# Altium PCB MP3_GIT.PcbDoc (part 1 of 2)
Units mm, origin at the board's own origin, x right, y up, seen from the top; angles counter-clockwise.
Board outline 55.37 x 101.47 mm, 4 copper layers (Top Layer, Int1 (GND), Int2 (PWR), Bottom Layer), stack 1.571 mm thick; 90 components, 60 nets, 372 pads, 171 vias.
Unrouted connection lines stored in the file: 1.
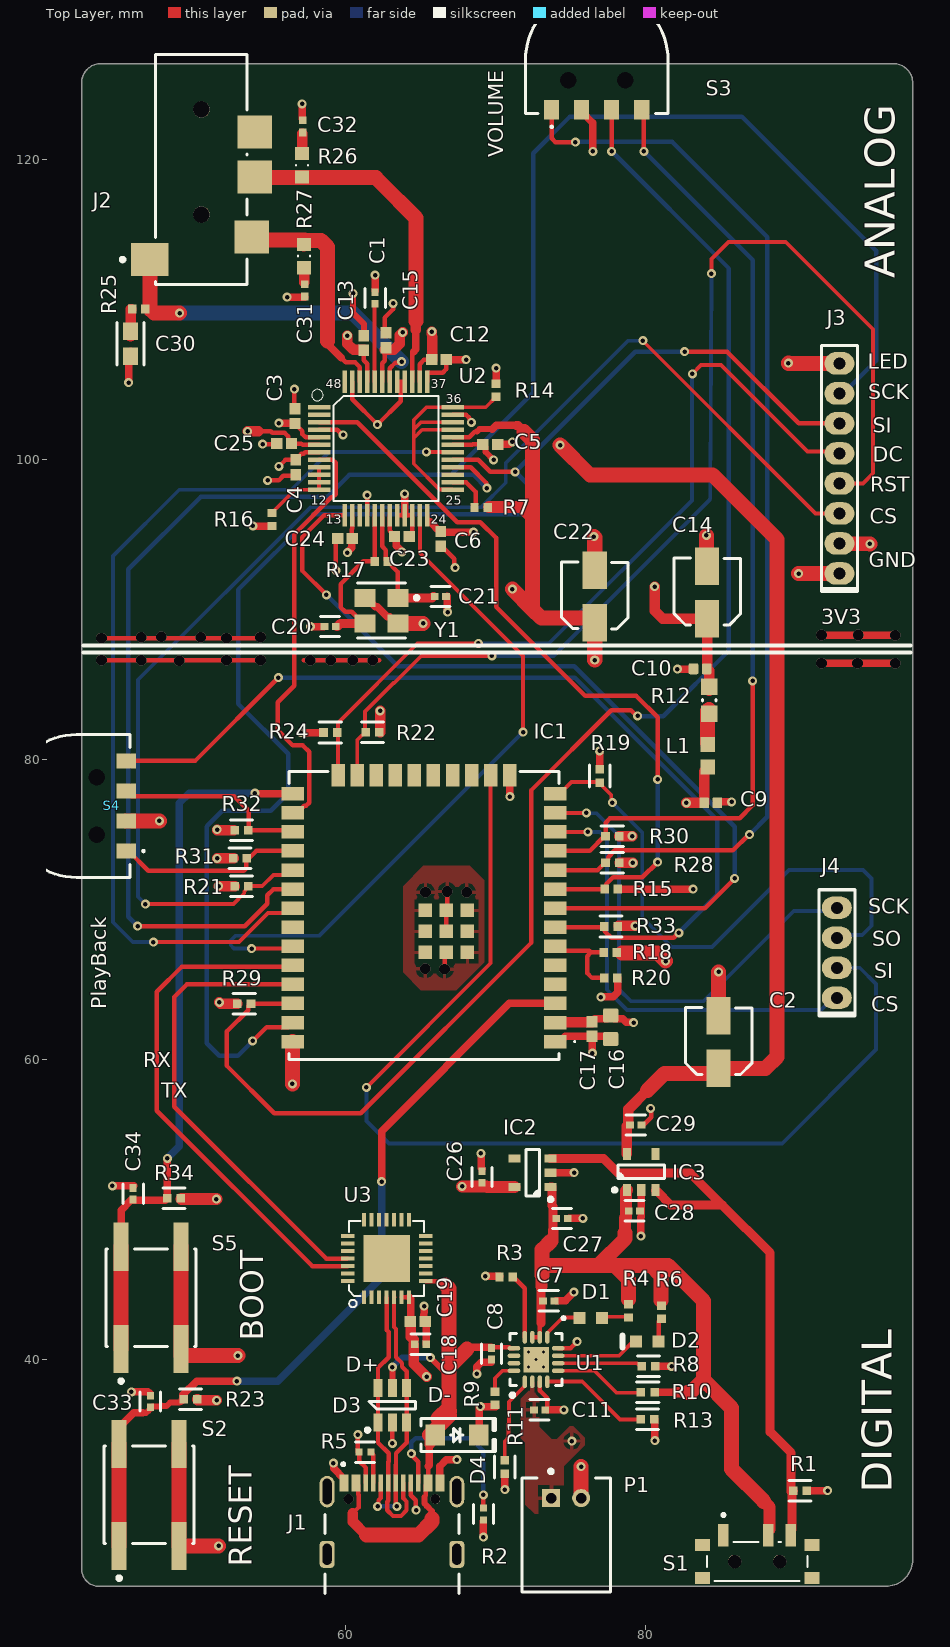
[diagram p0: Top Layer view]
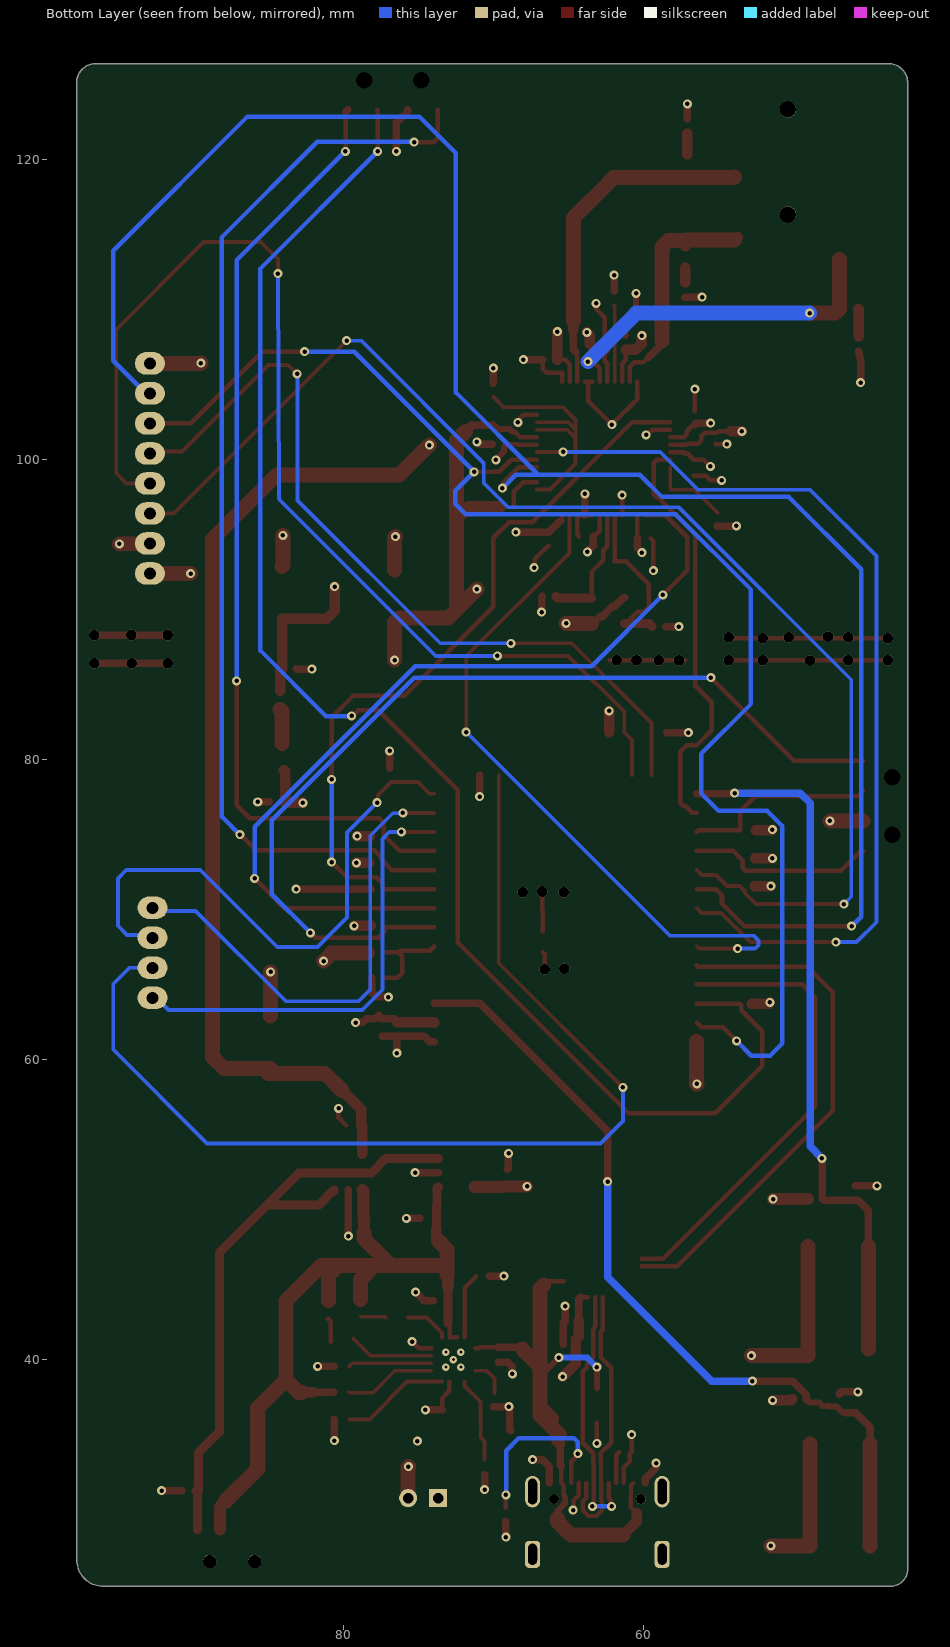
[diagram p1: Bottom Layer view, seen from below]
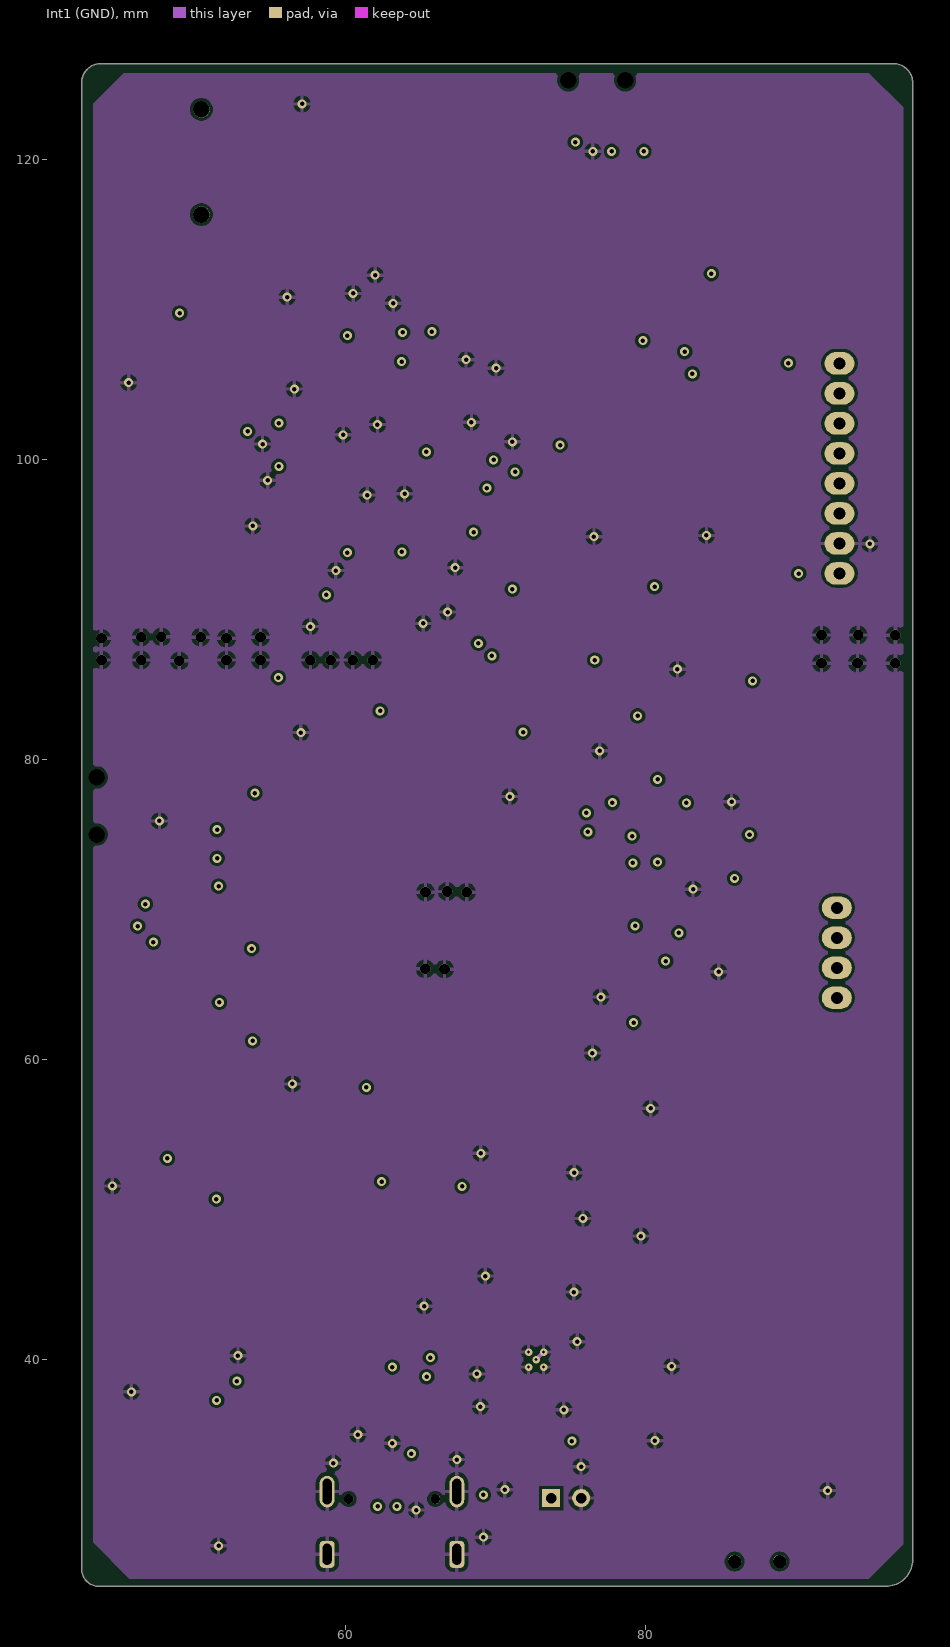
[diagram p2: Int1 (GND)]
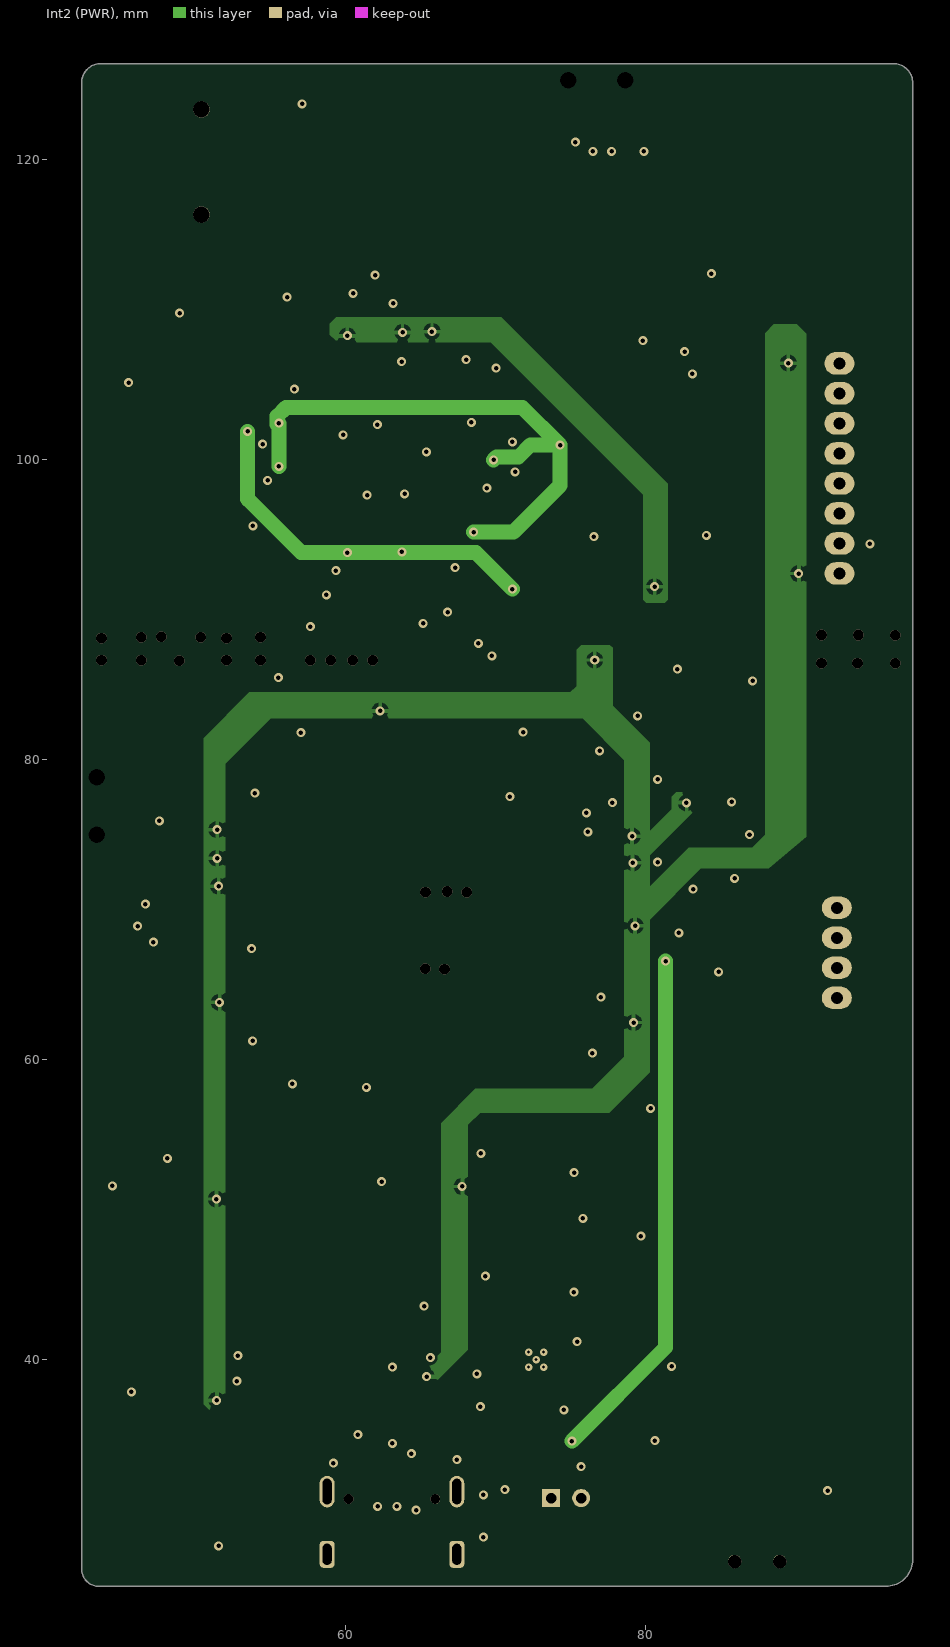
[diagram p3: Int2 (PWR)]
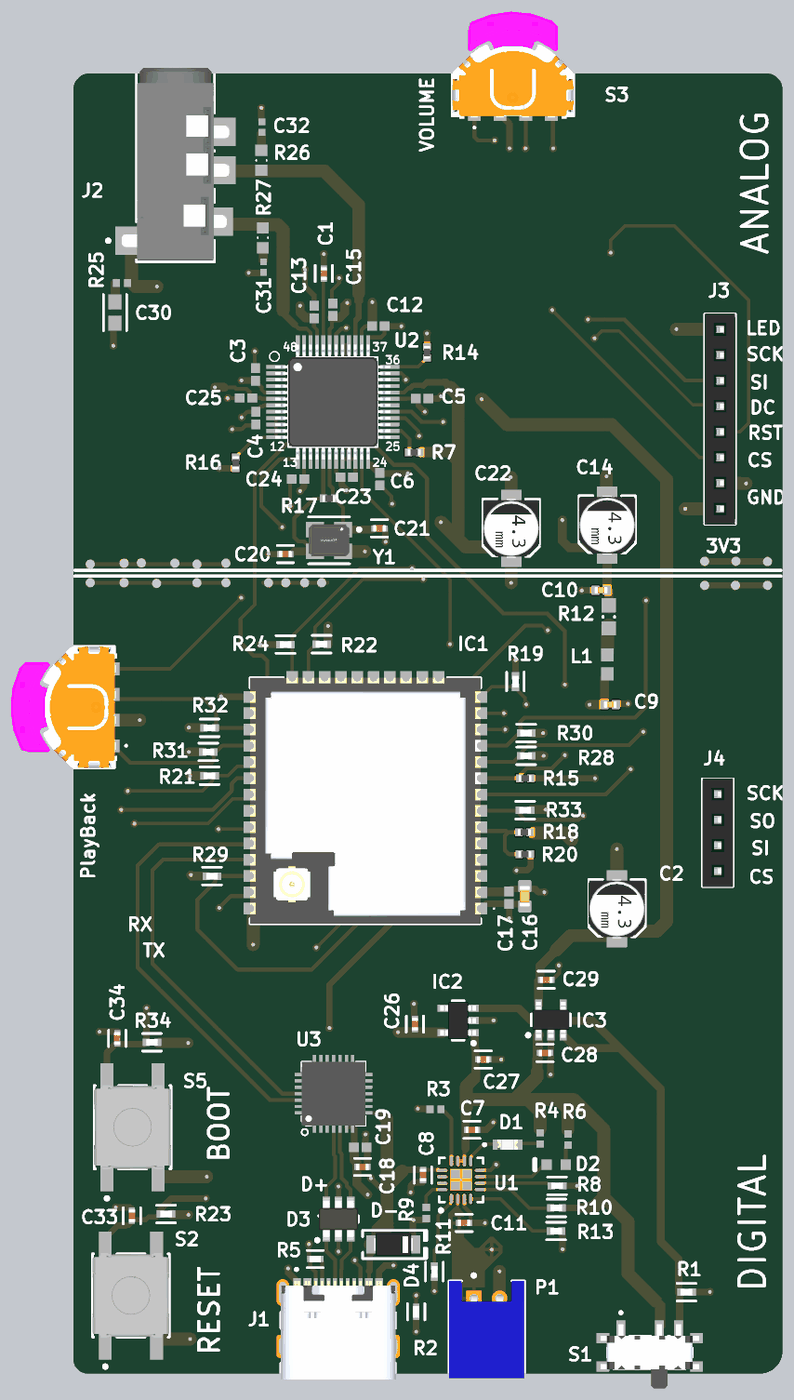
[diagram p5: 3D render of the assembled board from above, using the file's embedded part models]

## Layer stack, top to bottom
Top Solder: solder mask 0.0254, SM-001, Dk 4
Top Layer: signal copper 0.035
Dielectric 1: prepreg 0.2027, 7628, RC 49%, 8.6 mil, Dk 4.1
Int1 (GND): signal copper 0.0152
Dielectric 3: core 1.065, 1.1mm H/HOZ with copper, Dk 4.4
Int2 (PWR): signal copper 0.0152
Dielectric 5: prepreg 0.2027, 7628, RC 49%, 8.6 mil, Dk 4.1
Bottom Layer: signal copper 0.035
Bottom Solder: solder mask 0.0254, SM-001, Dk 4

## Board outline
42.418,26.035 ccw(c43.561,26.035) 43.561,24.892 96.012,24.892 ccw(c96.012,26.67) 97.79,26.67 97.79,125.095 ccw(c96.52,125.095) 96.52,126.365 43.688,126.365 ccw(c43.688,125.095) 42.418,125.095

## Design rules (kind name [scope] priority, off if disabled: settings)
Clearance [All] p1: gap=0.2 ignorepadtopadclearanceinfootprint=TRUE
DiffPairsRouting [All] p1: maxlimit=0.254 minlimit=0.203 mostfreqgap=0.254 toplayer_maxgap=0.203 toplayer_prefgap=0.203 toplayer_minwidth=0.286 toplayer_maxwidth=0.286 toplayer_prefwidth=0.286 bottomlayer_maxgap=0.203 bottomlayer_prefgap=0.203 bottomlayer_minwidth=0.286 bottomlayer_maxwidth=0.286 bottomlayer_prefwidth=0.286 impedanceprofiledriven=TRUE impedanceprofileid={A6390A73-D8A5-4BA7-A250-E89249BDB197} impedanceprofilevalue=90.000000 maxuncoupledlength=12.7
PolygonConnect [All] p1: connectstyle=Relief reliefconductorwidth=0.254 reliefentries=4 polygonreliefangle="90 Angle" airgapwidth=0.254
RoutingVias [All] p1: holewidth=0.3 width=0.6 viastyle="Through Hole" minholewidth=0.3 minwidth=0.5 maxholewidth=0.45 maxwidth=0.9
SolderMaskExpansion [All] p1: expansion=0 istentingtop=FALSE
SupplyNets "Schematic Supply Nets_6" [InNet('+VOUT')] p1: voltage=0.000
SupplyNets "Schematic Supply Nets_5" [InNet('+3V3')] p2: voltage=0.000
SupplyNets "Schematic Supply Nets_4" [InNet('+5V')] p3: voltage=0.000
SupplyNets "Schematic Supply Nets_3" [InNet('GND')] p4: voltage=0.000
SupplyNets "Schematic Supply Nets_2" [InNet('+1V8')] p5: voltage=0.000
SupplyNets "Schematic Supply Nets_1" [InNet('+AVDD')] p6: voltage=0.000
SupplyNets "Schematic Supply Nets" [InNet('+VBAT')] p7: voltage=0.000
UnRoutedNet [All] p1: checkbadconnections=TRUE
Width [All] p1: maxlimit=1 minlimit=0.2 preferedwidth=0.254 minimp=50.000000 maximp=50.000000 favimp=50.000000
28 further rules are at their usual default settings.

## Classes and differential pairs
differential pair class USB_D_P: USB_D
differential pair class USB_D_N: USB_D
differential pair USB_D: +USB_D_P -USB_D_N

## Components (designator, comment, footprint, x,y, rotation, side; value= is the part's Value field where it differs from the comment)
C1 "1uF" FP-CL511-IPC_C 61.976,110.744 r270 top
C2 "10 µF" "CAP ALSMD 4.3MM H5.4MM" 84.861,61.163 r90 top
C3 "100nF" CAPC1005X55X25ML05T10 56.635,102.868 r270 top
C4 "100nF" CAPC1005X55X25ML05T10 56.675,99.461 r90 top
C5 "100nF" CAPC1005X55X25ML05T10 69.639,100.99 r180 top
C6 "100nF" CAPC1005X55X25ML05T10 66.345,94.691 r90 top
C7 "4u7" FP-CL282-IPC_C 73.541,43.917 r0 top
C8 "1uF" FP-CL511-IPC_C 69.723,40.386 r270 top
C9 "CL05A106MQ5NUNC" CAPC1005X70N 84.341,77.101 r180 top value=10µF
C10 "CL05A106MQ5NUNC" CAPC1005X70N 83.624,86.03 r0 top value=10µF
C11 "4u7" FP-CL282-IPC_C 72.931,36.652 r0 top
C12 "100nF" CAPC1005X55X25ML05T10 66.23,106.647 r180 top
C13 "100nF" CAPC1005X55X25ML05T10 61.214,107.747 r270 top
C14 "10 µF" "CAP ALSMD 4.3MM H5.4MM" 84.099,91.11 r90 top
C15 "100nF" CAPC1005X55X25ML05T10 62.687,107.927 r270 top
C16 "CL10A226MQ8NRNC" CAPC1608X100N 77.671,62.145 r90 top value=22µF
C17 "100nF" CAPC1005X55X25ML05T10 76.429,62.027 r90 top
C18 "4u7" FP-CL282-IPC_C 64.999,41.022 r0 top
C19 "100nF" CAPC1005X55X25ML05T10 64.808,42.545 r180 top
C20 "33pF" FP-CL790-IPC_C 58.976,88.849 r180 top
C21 "33pF" FP-CL790-IPC_C 66.319,90.856 r0 top
C22 "10 µF" "CAP ALSMD 4.3MM H5.4MM" 76.606,90.853 r90 top
C23 "100nF" CAPC1005X55X25ML05T10 63.754,94.844 r180 top
C24 "100nF" CAPC1005X55X25ML05T10 59.969,94.717 r0 top
C25 "100nF" CAPC1005X55X25ML05T10 55.91,101.041 r0 top
C26 "1uF" FP-CL511-IPC_C 69.088,52.168 r90 top
C27 "1uF" FP-CL511-IPC_C 74.422,49.403 r0 top
C28 "1uF" FP-CL511-IPC_C 79.248,49.911 r0 top
C29 "1uF" FP-CL511-IPC_C 79.342,55.626 r0 top
C30 "47nF" FP-CL10-IPC_A 45.669,107.696 r270 top
C31 "10nF" CAPC1005X55X25LL05T05 57.277,111.244 r90 top
C32 "10nF" CAPC1005X55X25LL05T05 57.15,122.174 r270 top
C33 "1uF" FP-CL511-IPC_C 46.99,37.211 r90 top
C34 "1uF" FP-CL511-IPC_C 45.847,51.054 r90 top
D1 "RED" LED_KT-0603R 76.327,42.756 r0 top
D2 "Blue" LTST-C190TBKT-2_V 80.112,41.199 r180 top
D3 "USBLC6-4SC6" "ST SOT23-6L" 63.119,36.957 r90 top
D4 "" "SMF DO-219AB" 67.412,34.966 r0 top
IC1 "ESP32-WROOM-32UE-N4" ESP32WROOM32UEN4 65.223,69.602 r180 top
IC2 "AP2112K-3.3TRG1" "DIODES SOT-23-5 W5" 72.466,52.451 r180 top
IC3 "AP2112K-1.8TRG1" "DIODES SOT-23-5 W5" 79.705,52.502 r90 top
J1 "USB4105-GF-A-120" GCT_USB4105-GF-A-120 63.094,27.026 r0 top
J2 "SJ2-3574A-SMT-TR" FP-SJ2-3574A-SMT-TR-MFG 50.394,119.307 r270 top
J3 "NPPN081BFCN-RC" "SULLINS NPPN081BFCN" 92.913,99.386 r90 top
J4 "NPPN041BFCN-RC" "SULLINS NPPN041BFCN" 92.735,67.11 r90 top
L1 "LQM18PN3R3MFRL" INDC1608X95N 84.125,80.239 r90 top value=3.3µH
P1 "S2B-PH-K-S(LF)(SN)" JST-S2B-PH-K-S_V 74.701,28.321 r0 top
R1 "10K" FP-CRCW0402-e3-IPC_B 90.297,31.246 r0 top
R2 "5K1" FP-CRCW0402-e3-IPC_C 69.19,29.718 r90 top
R3 "0402WGF1101TCE" RESC1005X40N#1 70.695,45.518 r0 top value=1K1
R4 "0402WGF1101TCE" RESC1005X40N#1 78.867,43.242 r90 top value=1K1
R5 "5K1" FP-CRCW0402-e3-IPC_C 61.303,33.833 r0 top
R6 "0402WGF1101TCE" RESC1005X40N#1 81.044,43.156 r90 top value=1K1
R7 "0402WGF1003TCE" RESC1005X40N#2 69.029,96.794 r0 top value=100k
R8 "10K" FP-CRCW0402-e3-IPC_B 80.188,39.548 r180 top
R9 "0402WGF1101TCE" RESC1005X40N#1 69.973,37.428 r90 top value=1K1
R10 "10K" FP-CRCW0402-e3-IPC_B 80.137,37.821 r180 top
R11 "10K" FP-CRCW0402-e3-IPC_B 70.612,32.842 r270 top
R12 "1R" RESC0603(1608)_M 84.226,83.947 r90 top value="1.00 Ohm"
R13 "10K" FP-CRCW0402-e3-IPC_B 80.112,36.017 r0 top
R14 "0402WGF1003TCE" RESC1005X40N#2 70.028,104.597 r270 top value=100k
R15 "0402WGF1003TCE" RESC1005X40N#2 77.699,71.349 r180 top value=100k
R16 "0402WGF1003TCE" RESC1005X40N#2 55.093,95.982 r90 top value=100k
R17 "CRCW04021M00FKEDHP" RESC1005X40N#3 62.38,93.193 r0 top value=1M
R18 "0402WGF1003TCE" RESC1005X40N#2 77.643,67.132 r0 top value=100k
R19 "10K" FP-CRCW0402-e3-IPC_B 76.937,78.897 r270 top
R20 "0402WGF1003TCE" RESC1005X40N#2 77.673,65.43 r180 top value=100k
R21 "10K" FP-CRCW0402-e3-IPC_B 53.056,71.548 r0 top
R22 "10K" FP-CRCW0402-e3-IPC_B 61.803,81.813 r180 top
R23 "10K" FP-CRCW0402-e3-IPC_B 49.657,37.344 r0 top
R24 "10K" FP-CRCW0402-e3-IPC_B 58.983,81.788 r180 top
R25 "0402WGF100JTCE" RESC1005X40N#1 46.219,110.007 r0 top value=10R
R26 "0603WAF200JT5E" RESC1608X55N 57.099,119.579 r90 top value=20R
R27 "0603WAF200JT5E" RESC1608X55N 57.221,113.538 r270 top value=20R
R28 "10K" FP-CRCW0402-e3-IPC_B 77.775,73.105 r0 top
R29 "10K" FP-CRCW0402-e3-IPC_B 53.246,63.718 r180 top
R30 "10K" FP-CRCW0402-e3-IPC_B 77.775,74.876 r0 top
R31 "10K" FP-CRCW0402-e3-IPC_B 52.959,73.406 r180 top
R32 "10K" FP-CRCW0402-e3-IPC_B 53.056,75.286 r180 top
R33 "10K" FP-CRCW0402-e3-IPC_B 77.697,68.859 r0 top
R34 "10K" FP-CRCW0402-e3-IPC_B 48.557,50.747 r0 top
S1 "SSSS811101" SW_SSSS811101 87.429,26.543 r0 top value=N/A
S2 "EVQ-Q2Y03W" PNSC-EVQQ2_V 46.914,30.988 r90 top
S3 "SLLB520100" SLLB520100 76.738,127.197 r0 top
S4 "SLLB520100" SLLB520100 41.484,76.891 r90 top
S5 "EVQ-Q2Y03W" PNSC-EVQQ2_V 47.041,44.12 r90 top
U1 "BQ24074RGTRG4" RGT16-1700X1700TP 72.695,40.005 r90 top
U2 "" LQFP48-0.5-7X7MM 62.687,100.711 r0 top
U3 "" QFN28G_0.5-5X5MM 62.738,46.736 r90 top
Y1 "12.288 MHz" FP-ABM8G-MFG 62.382,89.916 r180 top

## Footprints (in the part's own frame and the unit in brackets; to place one, negate y for a bottom-side part, rotate by r counter-clockwise, add the part's x,y. Pads: shape width x height; smd on the part's side, far side on the other; paste and mask are expansions set on the pad)
"CAP ALSMD 4.3MM H5.4MM" [mm] "Aluminum Electrolytic Capacitor, Body 4.30x4.30x5.40mm, IPC Low Density"
  rect 2.5x1.6 smd: 1(-1.75,0) 2(1.75,0)
  silkscreen extent -2.17,-2.21 2.3,2.2, body extent -2.3,-2.2 2.3,2.2, height 5.4
CAPC1005X55X25LL05T05 [mm] "Chip Capacitor, 2-Leads, Body 1.00x0.50mm, IPC High Density"
  rect 0.52x0.52 smd: 1(-0.41,0) 2(0.41,0)
  body extent -0.53,-0.28 0.53,0.28, height 0.55
CAPC1005X55X25ML05T10 [mm] "Chip Capacitor, 2-Leads, Body 1.00x0.50mm, IPC Low Density"
  rect 0.76x0.72 smd: 1(-0.49,0) 2(0.49,0)
  body extent -0.53,-0.28 0.53,0.27, height 0.55
CAPC1005X70N [mm]
  rrect25% 0.64x0.72 smd paste+0 mask+0.102: 1(-0.439,0) 2(0.439,0)
  body extent -0.5,-0.25 0.5,0.25, height 0.7
CAPC1608X100N [mm]
  rrect25% 0.94x1.02 smd: 1(-0.79,0) 2(0.79,0)
  body extent -0.8,-0.4 0.8,0.4, height 1
"DIODES SOT-23-5 W5" [mm] "SOT23, 5-Leads, Body 3.00x2.85mm, Pitch 0.95mm, IPC Medium Density"
  rect 0.8x0.55 smd: 1(-1.2,0.95) 2(-1.2,0) 3(-1.2,-0.95) 4(1.2,-0.95) 5(1.2,0.95)
  silkscreen extent -1.33,-1.55 0.45,1.9, body extent -1.41,-1.45 1.41,1.45, height 1.5
ESP32WROOM32UEN4 [mm]
  rect 1.5x0.9 smd: 1(-8.75,8.41) 2(-8.75,7.14) 3(-8.75,5.87) 4(-8.75,4.6) 5(-8.75,3.33) 6(-8.75,2.06) 7(-8.75,0.79) 8(-8.75,-0.48) 9(-8.75,-1.75) 10(-8.75,-3.02) 11(-8.75,-4.29) 12(-8.75,-5.56) 13(-8.75,-6.83) 14(-8.75,-8.1) 25(8.75,-8.1) 26(8.75,-6.83) 27(8.75,-5.56) 28(8.75,-4.29) 29(8.75,-3.02) 30(8.75,-1.75) 31(8.75,-0.48) 32(8.75,0.79) 33(8.75,2.06) 34(8.75,3.33) 35(8.75,4.6) 36(8.75,5.87) 37(8.75,7.14) 38(8.75,8.41)
  rect 0.9x1.5 smd: 15(-5.715,-9.35) 16(-4.445,-9.35) 17(-3.175,-9.35) 18(-1.905,-9.35) 19(-0.635,-9.35) 20(0.635,-9.35) 21(1.905,-9.35) 22(3.175,-9.35) 23(4.445,-9.35) 24(5.715,-9.35)
  rect 0.9x0.9 smd: 39(-1.5,1.07) 40(-2.9,1.07) 41(-0.1,1.07) 42(-2.9,-0.33) 43(-1.5,-0.33) 44(-0.1,-0.33) 45(-0.1,2.47) 46(-1.5,2.47) 47(-2.9,2.47)
  silkscreen extent -10.1,-9.6 9,9.6, body extent -9,-9.6 9,9.6, height 3.35
FP-ABM8G-MFG [mm]
  rect 1.4x1.2 smd paste+0 mask+0: 1(-1.1,-0.85) 2(1.1,-0.85) 3(1.1,0.85) 4(-1.1,0.85)
  silkscreen extent -2.48,-1.83 1.6,1.83, body extent -1.9,-1.55 1.9,1.55, height 0.25
FP-CL10-IPC_A [mm]
  rect 1.158x1.012 smd paste+0 mask+0: 1(-0.827,0) 2(0.827,0)
  silkscreen extent -1.41,-0.91 1.41,0.91, body extent -1.91,-1.01 1.91,1.01, height 0.25
FP-CL282-IPC_C [mm]
  rect 0.515x0.472 smd paste+0 mask+0: 1(-0.379,0) 2(0.379,0)
  silkscreen extent -0.64,-0.67 0.64,0.67, body extent -0.74,-0.38 0.74,0.38, height 0.25
FP-CL511-IPC_C [mm]
  rect 0.515x0.472 smd paste+0 mask+0: 1(-0.379,0) 2(0.379,0)
  silkscreen extent -0.64,-0.67 0.64,0.67, body extent -0.74,-0.38 0.74,0.38, height 0.25
FP-CL790-IPC_C [mm]
  rect 0.515x0.472 smd paste+0 mask+0: 1(-0.379,0) 2(0.379,0)
  silkscreen extent -0.64,-0.67 0.64,0.67, body extent -0.74,-0.38 0.74,0.38, height 0.25
FP-CRCW0402-e3-IPC_B [mm]
  rect 0.568x0.572 smd paste+0 mask+0: 1(-0.452,0) 2(0.452,0)
  silkscreen extent -0.74,-0.69 0.74,0.69, body extent -0.89,-0.44 0.89,0.44, height 0.25
FP-CRCW0402-e3-IPC_C [mm]
  rect 0.468x0.472 smd paste+0 mask+0: 1(-0.402,0) 2(0.402,0)
  silkscreen extent -0.64,-0.67 0.64,0.67, body extent -0.74,-0.38 0.74,0.38, height 0.25
FP-SJ2-3574A-SMT-TR-MFG [mm]
  rect 2.2x2.5 smd paste+0 mask+0: 1(6,-3.45)
  rect 2.2x2.3 smd paste+0 mask+0: 2(4.5,3.35) 3(0.5,3.55) 4(-2.5,3.55)
  round 1.1 hole 1.1 unplated paste-2539.97 mask+0: ""(-4,0) ""(3,0)
  silkscreen extent -7.65,-5.37 7.65,3.05, body extent -7.75,-4.8 7.75,4.8, height 0.25
GCT_USB4105-GF-A-120 [mm]
  rect 0.6x1.15 smd: A1_B12(-3.2,4.755) A4_B9(-2.4,4.755) B1_A12(3.2,4.755) B4_A9(2.4,4.755)
  rect 0.3x1.15 smd: A5(-1.25,4.755) A6(-0.25,4.755) A7(0.25,4.755) A8(1.25,4.755) B5(1.75,4.755) B6(0.75,4.755) B7(-0.75,4.755) B8(-1.75,4.755)
  oval 1x2.1 hole 0.6 slot 1.7 at 90 deg: SH1(-4.32,4.18) SH2(4.32,4.18)
  rrect50% 1x1.8 hole 0.6 slot 1.4 at 90 deg: SH3(-4.32,0) SH4(4.32,0)
  round 0.65 hole 0.65 unplated: ""(-2.89,3.68) ""(2.89,3.68)
  silkscreen extent -4.47,-2.6 4.47,6.1, body extent -4.47,-2.6 4.47,5.11, height 3.31
INDC1608X95N [mm]
  rect 1x0.97 smd: 1(-0.735,0) 2(0.735,0)
JST-S2B-PH-K-S_V [mm] "THD, 2-Leads, Body 7.6x5.9mm, Pitch 2mm"
  rect 1.2x1.2 hole 0.7: 1(-1,2.45)
  round 1.2 hole 0.7: 2(1,2.45)
  silkscreen extent -2.95,-3.8 2.95,4.35, body extent -2.95,-3.8 2.95,3.8, height 4.8
LED_KT-0603R [mm]
  rect 0.8x0.8 smd: A(0.75,0) C(-0.75,0)
  silkscreen extent -1.9,-0.1 -1.7,0.1, body extent -0.8,-0.4 0.8,0.4, height 0.65
LQFP48-0.5-7X7MM [mm]
  rect 1.5x0.3 smd: 1(-4.45,2.75) 2(-4.45,2.25) 3(-4.45,1.75) 4(-4.45,1.25) 5(-4.45,0.75) 6(-4.45,0.25) 7(-4.45,-0.25) 8(-4.45,-0.75) 9(-4.45,-1.25) 10(-4.45,-1.75) 11(-4.45,-2.25) 12(-4.45,-2.75) 25(4.45,-2.75) 26(4.45,-2.25) 27(4.45,-1.75) 28(4.45,-1.25) 29(4.45,-0.75) 30(4.45,-0.25) 31(4.45,0.25) 32(4.45,0.75) 33(4.45,1.25) 34(4.45,1.75) 35(4.45,2.25) 36(4.45,2.75)
  rect 0.3x1.5 smd: 13(-2.75,-4.45) 14(-2.25,-4.45) 15(-1.75,-4.45) 16(-1.25,-4.45) 17(-0.75,-4.45) 18(-0.25,-4.45) 19(0.25,-4.45) 20(0.75,-4.45) 21(1.25,-4.45) 22(1.75,-4.45) 23(2.25,-4.45) 24(2.75,-4.45) 37(2.75,4.45) 38(2.25,4.45) 39(1.75,4.45) 40(1.25,4.45) 41(0.75,4.45) 42(0.25,4.45) 43(-0.25,4.45) 44(-0.75,4.45) 45(-1.25,4.45) 46(-1.75,4.45) 47(-2.25,4.45) 48(-2.75,4.45)
  silkscreen extent -4.94,-3.5 3.5,3.94, body extent -4.5,-4.5 4.5,4.5, height 1.6
LTST-C190TBKT-2_V [mm] "SMD, 2-Leads, Body 1.6x0.8mm"
  rect 0.8x0.8 smd: 1(-0.75,0) 2(0.75,0)
  silkscreen extent 1.65,-0.4 1.65,0.4, body extent -0.8,-0.4 0.8,0.4, height 0.8
PNSC-EVQQ2_V [mm] "SMD, 4-Leads, Body 6.5x6mm"
  rect 3.2x1 smd: 1(-3.4,2) 2(-3.4,-2) 3(3.4,2) 4(3.4,-2)
  silkscreen extent -5.67,-3 3.25,3, body extent -3.3,-3 3.3,3, height 3.1
QFN28G_0.5-5X5MM [mm]
  rect 0.9x0.254 smd: 1(-2.59,1.5) 2(-2.59,1) 3(-2.59,0.5) 4(-2.59,0) 5(-2.59,-0.5) 6(-2.59,-1) 7(-2.59,-1.5) 15(2.59,-1.5) 16(2.59,-1) 17(2.59,-0.5) 18(2.59,0) 19(2.59,0.5) 20(2.59,1) 21(2.59,1.5)
  rect 0.254x0.9 smd: 8(-1.5,-2.59) 9(-1,-2.59) 10(-0.5,-2.59) 11(0,-2.59) 12(0.5,-2.59) 13(1,-2.59) 14(1.5,-2.59) 22(1.5,2.59) 23(1,2.59) 24(0.5,2.59) 25(0,2.59) 26(-0.5,2.59) 27(-1,2.59) 28(-1.5,2.59)
  rect 3.1x3.1 smd paste-3: 29(0,0)
  silkscreen extent -3.25,-2.5 2.5,2.5, body extent -2.5,-2.5 2.5,2.5, height 1
RESC0603(1608)_M [mm] "Chip Resistor, Body 1.6x0.8mm, IPC Low Density"
  rect 1.1x1.1 smd: 1(-0.9,0) 2(0.9,0)
  silkscreen extent -0.05,-0.45 0.05,0.45, body extent -0.85,-0.47 0.85,0.47, height 0.6
RESC1005X40N#1 [mm]
  rect 0.56x0.6 smd: 1(-0.435,0) 2(0.435,0)
RESC1005X40N#2 [mm]
  rect 0.56x0.6 smd paste+0 mask+0.102: 1(-0.435,0) 2(0.435,0)
  body extent -0.5,-0.25 0.5,0.25, height 0.35
RESC1005X40N#3 [mm]
  rect 0.54x0.6 smd: 1(-0.432,0) 2(0.432,0)
  body extent -0.5,-0.25 0.5,0.25, height 0.4
RESC1608X55N [mm]
  rect 0.87x0.93 smd: 1(-0.78,0) 2(0.78,0)
  silkscreen extent -0.03,-0.4 0.03,0.4
RGT16-1700X1700TP [mm] "QFN, 16-Leads, Body 3x3mm, Pitch 0.5mm, Thermal Pad 1.7x1.7mm, TI Recommended"
  oval 0.85x0.28 smd paste-0.025 mask+0.07: 1(-1.475,0.75) 2(-1.475,0.25) 3(-1.475,-0.25) 4(-1.475,-0.75) 9(1.475,-0.75) 10(1.475,-0.25) 11(1.475,0.25) 12(1.475,0.75)
  oval 0.28x0.85 smd paste-0.025 mask+0.07: 5(-0.75,-1.475) 6(-0.25,-1.475) 7(0.25,-1.475) 8(0.75,-1.475) 13(0.75,1.475) 14(0.25,1.475) 15(-0.25,1.475) 16(-0.75,1.475)
  rect 1.7x1.7 smd paste-0.85 mask+0.07: 17(0,0)
  silkscreen extent -2.5,-1.73 1.73,1.73, body extent -1.57,-1.57 1.58,1.58, height 1
SLLB520100 [mm]
  rect 1x1.3 smd: 1(-3,-3.9) 2(3,-3.9) C1(-1,-3.9) T1(1,-3.9)
  round 0.55 hole 1.1 unplated: MH1(-1.9,-1.95) MH2(1.9,-1.95)
  silkscreen extent -4.75,-5.1 4.75,4.15, body extent -4.75,-4.37 4.75,3.98, height 2.33
"SMF DO-219AB" [mm] "Molded Diode, 2-Leads, Body 3.90x1.90mm, IPC Medium Density"
  rect 1.3x1.4 smd: 1(-1.45,0) 2(1.45,0)
  silkscreen extent -2.4,-1.1 2.59,1.1, body extent -1.5,-0.9 1.5,0.9, height 1.18
"ST SOT23-6L" [mm] "SOT23, 6-Leads, Body 2.93x2.80mm, Pitch 0.95mm"
  rect 1.2x0.6 smd: 1(-1.15,0.95) 2(-1.15,0) 3(-1.15,-0.95) 4(1.15,-0.95) 5(1.15,0) 6(1.15,0.95)
  silkscreen extent -1.78,-1.55 0.25,1.78, body extent -1.6,-1.53 1.6,1.53, height 1.45
"SULLINS NPPN041BFCN" [mm]
  oval 1.5x2 hole 0.8: 1(-3,0) 2(-1,0) 3(1,0) 4(3,0)
  silkscreen extent -4.2,-1.2 4.2,1.2, body extent -4.25,-1.2 4.25,1.2, height 4.41
"SULLINS NPPN081BFCN" [mm]
  oval 1.5x2 hole 0.8: 1(-7,0) 2(-5,0) 3(-3,0) 4(-1,0) 5(1,0) 6(3,0) 7(5,0) 8(7,0)
  silkscreen extent -8.2,-1.2 8.2,1.2, body extent -8.25,-1.2 8.25,1.2, height 4.41
SW_SSSS811101 [mm]
  rect 0.7x1.5 smd: 1(-2.25,1.75) 2(0.75,1.75) 3(2.25,1.75)
  rect 1x0.8 smd: SH1(-3.65,1.1) SH2(3.65,1.1) SH3(-3.65,-1.1) SH4(3.65,-1.1)
  round 0.9 hole 0.9 unplated: ""(-1.5,0) ""(1.5,0)
  silkscreen extent -3.35,-1.3 3.35,3.2, body extent -3.85,-2.8 3.85,2.2, height 1.4

## Part data
C1 C8 C26 C27 C28 C29 C33 C34: library part CMP-13271-001936-1, "Cap Ceramic 1uF 10V X5R ±10% SMD 0402 +85°C Paper T/R", Case Code (Imperial)=0402, Case Code (Metric)=1005, Dielectric=X5R, Max Operating Temperature=85°C, Min Operating Temperature=-55°C, Package Quantity=1, Tolerance=10%, Voltage Rating=10V, Capacitance=1uF, Case/Package=0402, Contact Plating=Tin, Depth=0.5mm, Height=0.5mm, Length=1mm, Material=Ceramic, Mount="Surface Mount", Packaging="Tape and Reel", Radiation Hardening=No, Thickness=0.022inch, Width=0.02inch
C2 C14 C22: library part EEE-HP1A100R, "CAP ALUM 10UF 20% 10V SMD", Device Package="Radial, Can - SMD", Lifetime @ Temp.="2000 Hrs @ 105°C", Manufacturer="Panasonic Electronic Components", Operating Temperature="-40°C ~ 105°C", Ratings=AEC-Q200, Ripple Current @ High Frequency="34 mA @ 10 kHz", Ripple Current @ Low Frequency="20 mA @ 120 Hz", Supplier Part Number 1=P19739CT-ND, Tolerance=±20%, Voltage - Rated="10 V", Applications=Automotive, Capacitance="10 µF", ComponentLink1Description=Datasheet, ComponentLink1URL=https://industrial.panasonic.com/cdbs/www-data/pdf/RDE0000/ABA0000C1157.pdf, ComponentLink2Description="DigiKey Link", ComponentLink2URL=https://www.digikey.com/en/products/detail/panasonic-electronic-components/EEE-HP1A100R/2689285, Height - Seated (Max)="0.232\" (5.90mm)", LastUpdated="2026-04-05 8:29:50 PM", Lifecycle Status=Active, Minimum Order=1, Mounting Type="Surface Mount", Package / Case="Radial, Can - SMD", Packaging=TapeAndReel, Part Number=EEE-HP1A100R, Part Status=Active, PartId=27191, Polarization=Bi-Polar, Price=0.10, Series=HB, Size / Dimension="0.157\" Dia (4.00mm)", Supplier 1=DigiKey, Surface Mount Land Size="0.169\" L x 0.169\" W (4.30mm x 4.30mm)"
C3 C4 C5 C6 C12 C13 C15 C17 C19 C23 C24 C25: library part CMP-2008-02013-1, Manufacturer=Vitramon, Part Number=VJ0402G104KXQCW1BC
C7 C11 C18: library part CMP-13271-000548-1, "Cap Ceramic 4.7uF 10V X5R ±20% SMD 0402 +85°C Paper T/R", Capacitance=4.7uF, Case Code (Imperial)=0402, Case Code (Metric)=1005, Dielectric=X5R, Max Operating Temperature=85°C, Min Operating Temperature=-55°C, Package Quantity=10000, Tolerance=20%, Voltage Rating=10V, Case/Package=0402, Lead Free="Lead Free", Length=0.039inch, Mount="Surface Mount", Packaging="Tape and Reel", Thickness=0.022inch, Width=0.02inch
C9 C10: library part CMP-001-00084-1, "10 ÂµF Â±20% 6.3V Ceramic Capacitor X5R 0402 (1005 Metric)", Case/Package="SMD-2 Samsung", Check_prices=https://www.snapeda.com/parts/CL05A106MQ5NUNC/Samsung/view-part/?ref=eda, Component Type=Standard, Design Item ID=CL05A106MQ5NUNC, MF=Samsung, MP=CL05A106MQ5NUNC, Pins=2, SnapEDA_Link=https://www.snapeda.com/parts/CL05A106MQ5NUNC/Samsung/view-part/?ref=snap, Source=CL05A106MQ5NUNC.SchLib
C16: library part CMP-001-00086-1, "CL10 Series 22 uF 6.3 V Â±20 % Tolerance X5R SMT Multilayer Ceramic Capacitor", Case/Package="SMD-2 Samsung", Check_prices=https://www.snapeda.com/parts/CL10A226MQ8NRNC/Samsung/view-part/?ref=eda, Component Type=Standard, Design Item ID=CL10A226MQ8NRNC, MF="Samsung Electro-Mechanics", MP=CL10A226MQ8NRNC, Pins=2, SnapEDA_Link=https://www.snapeda.com/parts/CL10A226MQ8NRNC/Samsung/view-part/?ref=snap, Source=CL10A226MQ8NRNC.SchLib
C20 C21: library part CMP-13271-001471-1, "Cap Ceramic 33pF 50V C0G ±5% SMD 0402 +125°C Paper T/R", Case Code (Imperial)=0402, Case Code (Metric)=1005, Dielectric=C0G, Max Operating Temperature=125°C, Min Operating Temperature=-55°C, Package Quantity=1, Temperature Coefficient=300ppm/°C, Tolerance=5%, Voltage=50V, Capacitance=33pF, Case/Package=0402, Contact Plating=Tin, Depth=0.5mm, Height=0.5mm, Lead Free="Lead Free", Length=1mm, Material=Ceramic, Mount="Surface Mount", Packaging="Tape and Reel", Radiation Hardening=No, Thickness=0.022inch, Voltage Rating=50V, Voltage Rating (DC)=50V, Width=0.02inch
C30: library part CMP-13271-001056-1, "Cap Ceramic 47nF 50V X7R ±10% Pad SMD 0603 +125°C T/R", Case Code (Imperial)=0603, Case Code (Metric)=1608, Dielectric=Y5V, Max Operating Temperature=125°C, Min Operating Temperature=-55°C, Package Quantity=4000, Tolerance=10%, Voltage=50V, Capacitance=47nF, Case/Package=0603, Contact Plating=Tin, Depth=0.8mm, Height=0.8mm, Lead Free="Lead Free", Length=1.6mm, Material=Ceramic, Mount="Surface Mount", Packaging="Tape and Reel", Radiation Hardening=No, Thickness=0.035inch, Voltage Rating=50V, Voltage Rating (DC)=50V, Width=0.031inch
C31 C32: library part CMP-1034-01870-2, Manufacturer=Vitramon, Part Number=VJ0402Y103JXQCW1BC
D1: library part CMP-004-00031-1, "Red 0603 Light Emitting Diodes", Case/Package=Package, Check_prices=https://www.snapeda.com/parts/KT-0603R/Hubei+KENTO+Elec/view-part/?ref=eda, Component Type=Standard, Design Item ID=KT-0603R, MF="Hubei KENTO Elec", MP=KT-0603R, Pins=2, SnapEDA_Link=https://www.snapeda.com/parts/KT-0603R/Hubei+KENTO+Elec/view-part/?ref=snap, Source=KT-0603R.SchLib
D2: library part CMP-007-00026-2, "LED Uni-Color Blue, 76 mW, 20 mA, -20 to 80 degC, 2-Pin SMD, RoHS, Tape and Reel", Case/Package=0603, Forward Current=20mA, Forward Voltage=2.8V, Manufacturer=Lite-On, Max Operating Temperature=80°C, Min Operating Temperature=-20°C, Package Description="2-Pin Surface Mount Device, Body 1.6 x 0.8 mm", Package Quantity=3000, Package Reference=C190TBKT-2, Colour=Blue, Datasheet URL=http://optoelectronics.liteon.com/upload/download/DS-22-99-0224/S_110_LTST-C190TBKT(0630).pdf, Datasheet Version="Rev. K, 08/2011", Illumination Colour=Blue, Lens Style=Diffused, Luminous Intensity=28mcd, Manufacturer URL=http://www.us.liteon.com/, Mounting Technology=SM, Nominal Vf=3.3V, Packaging=TapeandReel, Pins=2, RoHS Compliant=True, Viewing Angle=130degrees
D3: "TVS DIODE 5.25VWM 17VC SOT23-6", Current - Peak Pulse (10/1000µs)="5A (8/20µs)", Manufacturer=STMicroelectronics, Operating Temperature="-40°C ~ 125°C (TJ)", Package / Case=SOT-23-6, Power Line Protection=Yes, Supplier Part Number 1=497-4492-1-ND, Voltage - Breakdown (Min)=6V, Voltage - Clamping (Max) @ Ipp=17V, Voltage - Reverse Standoff (Typ)=5.25V, Applications=Ethernet, ComponentLink1Description=Datasheet, ComponentLink1URL=http://www.st.com/content/ccc/resource/technical/document/datasheet/9a/e6/1c/4f/b6/9a/44/e6/CD00047494.pdf/files/CD00047494.pdf/jcr:content/translations/en.CD00047494.pdf, ComponentLink2Description="DigiKey Link", ComponentLink2URL=https://www.digikey.com/en/products/detail/stmicroelectronics/USBLC6-4SC6/725216, LastUpdated="2026-05-12 6:33:50 PM", Lifecycle Status=Active, Minimum Order=1, Mounting Type="Surface Mount", Packaging=TapeAndReel, Part Number=USBLC6-4SC6, Part Status=Active, PartId=12106, Price=0.08, Series=USB, Supplier 1=DigiKey, Supplier Device Package=SOT-23-6, Type="Steering (Rail to Rail)", Unidirectional Channels=4
D4: library part VTVS5V0ASMF-M3-08, "TVS DIODE 5V 8.9V DO219AB", Capacitance @ Frequency="2095pF @ 1MHz", Current - Peak Pulse (10/1000µs)=42.95A, Manufacturer="Vishay Semiconductor Diodes Division", Operating Temperature="-55°C ~ 175°C (TJ)", Package / Case=DO-219AB, Power - Peak Pulse=400W, Power Line Protection=No, Supplier Device Package="DO-219AB (SMF)", Supplier Part Number 1=VTVS5V0ASMF-M3-08GICT-ND, Voltage - Breakdown (Min)=6.4V, Voltage - Clamping (Max) @ Ipp=8.9V, Voltage - Reverse Standoff (Typ)=5V, Applications="General Purpose", ComponentLink1Description=Datasheet, ComponentLink1URL=http://www.vishay.com/docs/85891/vtvs3v3asmf.pdf, ComponentLink2Description="DigiKey Link", ComponentLink2URL=http://digikey.com/product-detail/en/vishay-semiconductor-diodes-division/VTVS5V0ASMF-M3-08/VTVS5V0ASMF-M3-08GICT-ND/7056003, LastUpdated="2026-04-05 9:00:08 PM", Lifecycle Status=Active, Minimum Order=1, Mounting Type="Surface Mount", Packaging=TapeAndReel, Part Number=VTVS5V0ASMF-M3-08, Part Status=Active, PartId=5492, Price=0.11, Series=TransZorb®, Supplier 1=DigiKey, Type=Zener, Unidirectional Channels=1
IC1: "Integrated Circuit", Manufacturer_Name="Espressif Systems", Mouser Part Number=356-ESP32WRM32UE32UH, Datasheet Link=https://www.espressif.com/sites/default/files/documentation/esp32-wroom-32e_esp32-wroom-32ue_datasheet_en.pdf, Height=3.35mm, Manufacturer_Part_Number=ESP32-WROOM-32UE-N4, Mouser Price/Stock=https://www.mouser.co.uk/ProductDetail/Espressif-Systems/ESP32-WROOM-32UE-N4?qs=Li%252BoUPsLEnsnnWrvUBU2ZA%3D%3D
IC2: "IC REG LINEAR 3.3V 600MA SOT-25", Current - Output=600mA, Current - Quiescent (Iq)="80 µA", Manufacturer="Diodes Incorporated", Operating Temperature="-40°C ~ 85°C", Package / Case="SC-74A, SOT-753", Supplier Device Package=SOT-25, Supplier Part Number 1=AP2112K-3.3TRG1DICT-ND, Voltage - Input (Max)=6V, Voltage - Output (Min/Fixed)=3.3V, Voltage Dropout (Max)="0.4V @ 600mA", ComponentLink1Description=Datasheet, ComponentLink1URL=https://www.diodes.com/assets/Datasheets/AP2112.pdf, ComponentLink2Description="DigiKey Link", ComponentLink2URL=https://www.digikey.com/en/products/detail/diodes-incorporated/AP2112K-3-3TRG1/4470746, Control Features=Enable, LastUpdated="2026-04-05 8:55:48 PM", Lifecycle Status=Active, Minimum Order=1, Mounting Type="Surface Mount", Number of Regulators=1, Output Configuration=Positive, Output Type=Fixed, Packaging=TapeAndReel, Part Number=AP2112K-3.3TRG1, Part Status=Active, Price=0.08, Protection Features="Over Current, Over Temperature", PSRR="65dB (100Hz ~ 1kHz)", Series=-, Supplier 1=DigiKey
IC3: "IC REG LINEAR 1.8V 600MA SOT-25", Current - Output=600mA, Current - Quiescent (Iq)="80 µA", Manufacturer="Diodes Incorporated", Operating Temperature="-40°C ~ 85°C", Package / Case="SC-74A, SOT-753", Supplier Device Package=SOT-25, Supplier Part Number 1=AP2112K-1.8TRG1DICT-ND, Voltage - Input (Max)=6V, Voltage - Output (Min/Fixed)=1.8V, Voltage Dropout (Max)="0.7V @ 600mA", ComponentLink1Description=Datasheet, ComponentLink1URL=https://www.diodes.com/assets/Datasheets/AP2112.pdf, ComponentLink2Description="DigiKey Link", ComponentLink2URL=https://www.digikey.com/en/products/detail/diodes-incorporated/AP2112K-1-8TRG1/4470745, Control Features=Enable, LastUpdated="2026-04-05 8:55:48 PM", Lifecycle Status=Active, Minimum Order=1, Mounting Type="Surface Mount", Number of Regulators=1, Output Configuration=Positive, Output Type=Fixed, Packaging=TapeAndReel, Part Number=AP2112K-1.8TRG1, Part Status=Active, Price=0.08, Protection Features="Over Current, Over Temperature", PSRR="65dB (100Hz ~ 1kHz)", Series=-, Supplier 1=DigiKey
J1: library part CMP-002-00071-1, "USB CONN, 2.0 TYPE C, RCPT, 16POS, SMT; USB Connector Type:USB Type C; USB Standard:USB 2.0; Gender:Receptacle; No. of Positions:16Positions; Connector Mounting:Surface Mount, Through Hole Mount; Orientation:Right Angle RoHS Compliant: Yes", Case/Package=None, Check_prices=https://www.snapeda.com/parts/USB4105GFA120/Global+Connector+Technology/view-part/?ref=eda, Component Type=Standard, Design Item ID=USB4105-GF-A-120, MF="Global Connector Technology", MP=USB4105GFA120, Pins=16, SnapEDA_Link=https://www.snapeda.com/parts/USB4105GFA120/Global+Connector+Technology/view-part/?ref=snap, Source=USB4105-GF-A-120.SchLib
J2: library part CMP-14818-000001-1, "AUDIO JACK, 3.5 MM, RT, 4 CONDUC", Current Rating=1A, Manufacturer=CUI, Temperature="-25°C to +85°C", Temperature Range High=+85°C, Temperature Range Low=-25°C, Voltage Rating=12V, Automotive=No, Category=Conn, ComponentLink2Description=Datasheet, ComponentLink2URL=https://www.cui.com/product/resource/sj2-357x-smt.pdf, Conn Orientation=Horizontal, Contact Material=Silver, Device Class L1=Connectors, Device Class L2="Audio / Video Connectors", Device Class L3=unset, Digikey Description="AUDIO JACK, 3.5 MM, RT, 4 CONDUC", Height=5.3mm, Lead Free=Yes, Manufacturer Part Number=SJ2-3574A-SMT-TR, Number of Contacts=4, Octopart=https://octopart.com/sj2-3574a-smt-tr-cui-77838840, Package=SJ2-3574A-SMT-TR, RoHS=TRUE
J3: "CONN HDR 8POS 0.079 GOLD PCB", Current Rating (Amps)=2A, Insulation Color=Black, Manufacturer="Sullins Connector Solutions", Material Flammability Rating="UL94 V-0", Operating Temperature="-40°C ~ 105°C", Supplier Part Number 1=S5751-08-ND, ComponentLink1Description=Datasheet, ComponentLink1URL=https://drawings-pdf.s3.amazonaws.com/10483.pdf, ComponentLink2Description="DigiKey Link", ComponentLink2URL=https://www.digikey.com/en/products/detail/sullins-connector-solutions/NPPN081BFCN-RC/804810, Connector Type=Header, Contact Finish - Mating=Gold, Contact Finish - Post=Gold, Contact Finish Thickness - Mating=Flash, Contact Length - Post="0.094\" (2.40mm)", Contact Type="Female Socket", Fastening Type=Push-Pull, Insulation Height="0.173\" (4.40mm)", LastUpdated="2022-06-21 2:43:53 PM", Lifecycle Status=Active, Minimum Order=1, Mounting Type="Through Hole", Number of Positions=8, Number of Positions Loaded=All, Number of Rows=1, Packaging=Tube, Part Number=NPPN081BFCN-RC, Part Status=Active, Pitch - Mating="0.079\" (2.00mm)", Price=0.44, Series=-, Style="Board to Board", Supplier 1=DigiKey, Termination=Solder
J4: "CONN HDR 4POS 0.079 GOLD PCB", Current Rating (Amps)=2A, Insulation Color=Black, Manufacturer="Sullins Connector Solutions", Material Flammability Rating="UL94 V-0", Operating Temperature="-40°C ~ 105°C", Supplier Part Number 1=S5751-04-ND, ComponentLink1Description=Datasheet, ComponentLink1URL=https://drawings-pdf.s3.amazonaws.com/10483.pdf, ComponentLink2Description="DigiKey Link", ComponentLink2URL=https://www.digikey.com/en/products/detail/sullins-connector-solutions/NPPN041BFCN-RC/804806, Connector Type=Header, Contact Finish - Mating=Gold, Contact Finish - Post=Gold, Contact Finish Thickness - Mating=Flash, Contact Length - Post="0.094\" (2.40mm)", Contact Type="Female Socket", Fastening Type=Push-Pull, Insulation Height="0.173\" (4.40mm)", LastUpdated="2022-06-21 2:42:51 PM", Lifecycle Status=Active, Minimum Order=1, Mounting Type="Through Hole", Number of Positions=4, Number of Positions Loaded=All, Number of Rows=1, Packaging=Tube, Part Number=NPPN041BFCN-RC, Part Status=Active, Pitch - Mating="0.079\" (2.00mm)", Price=0.30, Series=-, Style="Board to Board", Supplier 1=DigiKey, Termination=Solder
L1: library part CMP-006-00021-1, "FIXED IND 3.3UH 700MA 350 MOHM", Case/Package=None, Availability=Unavailable, Component Type=Standard, Design Item ID=LQM18PN3R3MFRL, MP=LQM18PN3R3MFRL, Pins=2, Price=None, Source=LQM18PN3R3MFRL.SchLib
P1: library part CMP-1755-00004-1, "Male Header, Pitch 2 mm, 1 x 2 Position, Height 4.8 mm, Tail Length 3.4 mm, -25 to 85 degC, RoHS, Bulk", Capacitance="10 uF", Case\Package=Radial, Max Operating Temperature="85 degC", Min Operating Temperature="-40 degC", Package Quantity=200, Tolerance=20%, Voltage Rating="50 V", ComponentLink1Description=Datasheet, ComponentLink1URL=http://www.jst-mfg.com/product/pdf/eng/ePH.pdf, DatasheetVersion=Dec-12, Diameter="5 mm", Height="11 mm", Lead Pitch="2 mm", Length="11 mm", Mount="Through Hole", PackageDescription="Male Header, Pitch 2 mm, 1 x 2 Position, Height 4.8 mm, Tail Length 3.4 mm", PackageReference=S2B-PH-K-S, Packaging=Bulk, Pins=2, Radiation Hardening=No, REACH SVHC="No SVHC", RoHSCompliant=true, Voltage Rating (DC)="50 V"
R1 R8 R10 R11 R13 R19 R21 R22 R23 R24 R28 R29 R30 R31 R32 R33 R34: library part CMP-2002-08136-3, "RES Thick Film, 10kΩ, 5%, 0.063W, 200ppm/°C, 0402", Case Code (Imperial)=0402, Case Code (Metric)=1005, Max Operating Temperature=155°C, Max Power Dissipation=63mW, Min Operating Temperature=-55°C, Package Quantity=1, Resistance=10kR, Temperature Coefficient=200ppm/°C, Tolerance=5%, Voltage Rating=50V, Case/Package=0402, Composition="Thick Film", Contact Plating=Tin, Depth=0.5mm, Features="Automotive AEC-Q200", Height=0.016inch, Length=1mm, Military Standard=Not, Mount="Surface Mount", Number of Terminations=2, Packaging="Tape and Reel", Power Rating=63mW, Radiation Hardening=No, Termination=SMD/SMT, Weight=2.3E-05oz, Width=0.5mm
R2 R5: library part CMP-2002-00117-2, "RES Thick Film, 5.11kΩ, 1%, 0.063W, 100ppm/°C, 0402", Case Code (Imperial)=0402, Case Code (Metric)=1005, Max Operating Temperature=155°C, Max Power Dissipation=63mW, Min Operating Temperature=-55°C, Package Quantity=10, Resistance=5.11kR, Temperature Coefficient=100ppm/°C, Tolerance=1%, Voltage Rating=50V, Case/Package=0402, Composition="Thick Film", Contact Plating=Tin, Depth=0.5mm, Features="Automotive AEC-Q200", Height=0.35mm, Lead Free="Lead Free", Length=1mm, Military Standard=Not, Mount="Surface Mount", Number of Pins=2, Number of Terminations=2, Packaging="Tape and Reel", Power Rating=63mW, Radiation Hardening=No, Termination=SMD/SMT, Voltage Rating (DC)=50V, Weight=2.3E-05oz, Width=0.02inch
R3 R4 R6 R9: library part CMP-009-00177-1, "1.1K Ohm 1/16W Thick Film Resistor 0402 Chip - Surface Mount", Case/Package=None, Check_prices=https://www.snapeda.com/parts/0402WGF1101TCE/Uni-Royal/view-part/?ref=eda, Component Type=Standard, Design Item ID=0402WGF1101TCE, MF=Uni-Royal, MP=0402WGF1101TCE, Pins=2, SnapEDA_Link=https://www.snapeda.com/parts/0402WGF1101TCE/Uni-Royal/view-part/?ref=snap, Source=0402WGF1101TCE.SchLib
R7 R14 R15 R16 R18 R20: library part CMP-009-00178-1, "100K Ohm 1/16W Thick Film Resistor 0402 Chip - Surface Mount", Case/Package="0402-2 ROYAL", Check_prices=https://www.snapeda.com/parts/0402WGF1003TCE/Uni-Royal/view-part/?ref=eda, Component Type=Standard, Design Item ID=0402WGF1003TCE, MF=Uni-Royal, MP=0402WGF1003TCE, Pins=2, SnapEDA_Link=https://www.snapeda.com/parts/0402WGF1003TCE/Uni-Royal/view-part/?ref=snap, Source=0402WGF1003TCE.SchLib
R12: library part CMP-1012-00002-1, "1R 0.1W 5% 0603 (1608 Metric)  SMD", Case-EIA=0603, Case-Metric=1608, Power="0.1 W", Tolerance="5 %", Technology=SMT
R17: library part CMP-009-00179-1, "Resistor;Thick Film;1 Megohms;0.125 W;1%;SMT;0402;TCR 37 ppm/DegC", Case/Package="1005 Panasonic Electronic Components", Check_prices=https://www.snapeda.com/parts/CRCW04021M00FKEDHP/Vishay+Dale/view-part/?ref=eda, Component Type=Standard, Design Item ID=CRCW04021M00FKEDHP, MF="Vishay Dale", MP=CRCW04021M00FKEDHP, Pins=2, SnapEDA_Link=https://www.snapeda.com/parts/CRCW04021M00FKEDHP/Vishay+Dale/view-part/?ref=snap, Source=CRCW04021M00FKEDHP.SchLib
R25: library part CMP-009-00180-1, "10 Ohm 1/16W Thick Film Resistor 0402 Chip - Surface Mount", Case/Package=None, Check_prices=https://www.snapeda.com/parts/0402WGF100JTCE/Uni-Royal/view-part/?ref=eda, Component Type=Standard, Design Item ID=0402WGF100JTCE, MF=Uni-Royal, MP=0402WGF100JTCE, Pins=2, SnapEDA_Link=https://www.snapeda.com/parts/0402WGF100JTCE/Uni-Royal/view-part/?ref=snap, Source=0402WGF100JTCE.SchLib
R26 R27: library part CMP-009-00181-1, "20 Ohm 1/10W Thick Film Resistor 0603 Chip - Surface Mount", Case/Package=None, Check_prices=https://www.snapeda.com/parts/0603WAF200JT5E/Uni-Royal/view-part/?ref=eda, Component Type=Standard, Design Item ID=0603WAF200JT5E, MF=Uni-Royal, MP=0603WAF200JT5E, Pins=2, SnapEDA_Link=https://www.snapeda.com/parts/0603WAF200JT5E/Uni-Royal/view-part/?ref=snap, Source=0603WAF200JT5E.SchLib
S1: library part CMP-011-00014-1, "Switch Slide SP Side Slide 0.3A 5VDC 10000Cycles Gull Wing SMD T/R", Case/Package=None, Check_prices=https://www.snapeda.com/parts/SSSS811101/ALPS/view-part/?ref=eda, Component Type=Standard, Design Item ID=SSSS811101, MF=ALPS, MP=SSSS811101, Pins=3, SnapEDA_Link=https://www.snapeda.com/parts/SSSS811101/ALPS/view-part/?ref=snap, Source=SSSS811101.SchLib
S2 S5: library part CMP-2000-06232-1, "Light Touch Switche, 3.5 N Force, Height 3.1 mm, -40 to 85 degC, 4-Pin SMD, RoHS, Tape and Reel", Actuator / Cap Colour=White, Contact Current DC Max=20mA, Contact Resistance Max=100mohm, Contact Voltage AC Max=250V, Contact Voltage DC Max=15V, Manufacturer=Panasonic, Operating Force=3.5N, Operating Temperature Max=85°C, Operating Temperature Min=-40°C, Package Description="4-Pin Surface Mount Device, Body 6.5 x 6 mm", Package Reference=EVQQ2, Actuation Type=Top, Body Depth=6mm, Body Width=6.5mm, Contact Configuration=SPST-NO, Contact Current Max=20mA, Contact Current Rating=20mA, Contact Voltage DC Nom=15V, Datasheet URL=http://download.siliconexpert.com/pdfs/2014/10/4/5/54/9/232/pns_/manual/8atk0000ce28.pdf, Datasheet Version=09/2014, Dielectric Strength VAC=250V, External Depth=1.8mm, External Length / Height=3.1mm, External Width=6.5mm, Height=3.1mm, Manufacturer URL=http://www.panasonic.com/, Mounting Technology=SurfaceMount, No. of Mechanical Operations=100000, No. of Poles=1, No. of Ways=1, Operating Force Min=3.5N, Series=EVQQ2, SVHC=NoSVHC(16-Dec-2013), Switch Operation=Off-On, Switch Terminals=Solder, Terminal Type=SMD
S3 S4: "Switch", Manufacturer_Name="ALPS Electric", Mouser Part Number=688-SLLB520100, Datasheet Link=https://www.mouser.com/datasheet/2/15/SLLB5-1570014.pdf, Height=2.2mm, Manufacturer_Part_Number=SLLB520100, Mouser Price/Stock=https://www.mouser.co.uk/ProductDetail/Alps-Alpine/SLLB520100?qs=6EGMNY9ZYDSJ4FGQvxWR1w%3D%3D
U1: library part CMP-0321-00219-1, "USB-Friendly Li-Ion Battery Charger and Power-Path Management IC, 10.5 V OVP, 4.3 V, -40 to 85 degC, 16-pin QFN (RGT), Green (RoHS & no Sb/Br)", Manufacturer="Texas Instruments", Over Voltage Protection=N, Code_JEDEC=MO-220, ComponentLink1Description=Datasheet, ComponentLink1URL=http://www.ti.com/general/docs/lit/getliterature.tsp?genericPartNumber=BQ24074&fileType=pdf, DatasheetVersion=SLUS810G, Eco-Plan="Green (RoHS & no Sb/Br)", Lead Acid=N, Li-Ion=N, Li-Polymer=N, Mounting Technology="Surface Mount", NiCd=N, NiMH=N, PackageDescription="16-Pin Plastic Quad Flat No-Lead, 3 x 3 mm Body, 0.5 mm Pitch, 1.7 x 1.7 mm Exposed Pad", PackageReference=RGT16-1700X1700TP, PackageVersion="revH, Oct-2011", PartNumber=BQ24074RGTRG4, SubFamily="Battery Charge Management", Vin(Min)(V)=4.3
U2: library part CMP-009-000000-1, "VS1053B MP3/WAV/OGG/MIDI Player & Recorder (CODEC) Chip", Package="LQFP-48 VLSI", Check_prices=https://www.snapeda.com/parts/VS1053B-L/VLSI/view-part/?ref=eda, Component Type=Standard, Design Item ID=CODECODER-VS1053B(LQFP48), MF=VLSI, MP=VS1053B-L, Pin Count=48, SnapEDA_Link=https://www.snapeda.com/parts/VS1053B-L/VLSI/view-part/?ref=snap, Source=CODECODER-VS1053B(LQFP48).SchLib
U3: library part CMP-013-000000-1, "USB Bridge, USB to UART USB 2.0 UART Interface 28-QFN (5x5)", Package="VFQFN-28 Vishay Siliconix", Availability="In Stock", Check_prices=https://www.snapeda.com/parts/CP2102-GMR/Silicon+Labs/view-part/?ref=eda, Component Type=Standard, Design Item ID=INTERFACE-CP2102-GMR(QFN28), MF=Silicon, MP=CP2102-GMR, Pin Count=29, Price=None, Purchase-URL=https://pricing.snapeda.com/search/part/CP2102-GMR/?ref=eda, SnapEDA_Link=https://www.snapeda.com/parts/CP2102-GMR/Silicon+Labs/view-part/?ref=snap, Source=INTERFACE-CP2102-GMR(QFN28).SchLib
Y1: library part CMP-27762-013733-1, "Crystal 12.288MHz ±20ppm (Tol) ±30ppm (Stability) 18pF FUND 80Ω 4-Pin SMD T/R", Case/Package=SMD/SMT, ESR (Equivalent Series Resistance)=80R, Frequency=12.288MHz, Frequency Stability=30ppm, Frequency Tolerance=20ppm, Load Capacitance=18pF, Max Operating Temperature=85°C, Min Operating Temperature=-40°C, Package Quantity=3000, Height=1mm, Length=3.2mm, Mount="Surface Mount", Number of Pins=4, Packaging="Tape and Reel", Series=ABM8G, Series Resistance=80R, Termination=SMD/SMT, Tolerance=20ppm, Width=2.5mm

## Via types
v1: diameter 0.6, hole 0.3, Top Layer to Bottom Layer, 140 vias
v2: diameter 0.711, hole 0.711, Top Layer to Bottom Layer, 26 vias
v3: diameter 0.5, hole 0.2, Top Layer to Bottom Layer, tented top, 5 vias

## Nets (pads, with @x,y where several pads share a name; then routed paths per layer and width w, separated by ;. In a path a pad name is that pad's centre, name@x,y a point inside that pad or via, vN(x,y) a via of type N, cw(c..) or ccw(c..) an arc to the next point about the centre after c; other vN are vias at no path point)
+1V8: C2.1 C3.2 C4.2 C5.2 C6.2 C29.1 IC3.5 U2.5 U2.7 U2.24 U2.31 | length 117.6
  Top Layer w0.3: v1(55.563,99.516) 55.998,99.951 C4.2@56.675,99.951 56.675,99.971 57.06,100.357 57.2,100.357 57.304,100.461 U2.7@58.237,100.461 ; C3.2@56.635,102.378 56.635,102.358 57.13,101.863 57.13,101.673 57.342,101.461 U2.5@58.237,101.461 ; U2.24@65.437,96.261 65.437,95.827 65.634,95.827 ; U2.31@67.137,100.961 68.445,100.961 68.474,100.99 C5.2@69.204,100.99
  Top Layer w0.4: C5.2@69.149,100.99 69.169,100.99 69.329,100.83 69.329,100.485 69.853,99.961 v1(69.859,99.961)
  Top Layer w0.5: v1(55.55,102.401) 55.561,102.39 56.538,102.39 C3.2@56.616,102.311 ; 65.634,95.827 66.32,95.141 68.522,95.141 v1(68.529,95.148)
  Top Layer w0.7: IC3.5@78.755,53.702 78.755,55.54 78.842,55.626 78.842,56.667 80.112,57.937
  Top Layer w1: v1(74.295,100.94) 76.276,98.958 84.455,98.958 88.455,94.959 88.748,94.666 88.748,60.173 87.988,59.413 C2.1@84.861,59.413 ; 80.112,57.937 81.255,59.08 C2.1@85.039,59.08
  Int2 (PWR) w1: v1@55.448,102.311 55.448,102.868 56.034,103.454 71.78,103.454 v1(74.295,100.94) ; v1(55.563,99.516) v1@55.563,102.388 ; v1(68.529,95.148) 71.196,95.148 74.295,98.247 v1(74.295,100.94) ; v1(69.859,99.961) 70.06,100.162 71.534,100.162 72.312,100.94 v1(74.295,100.94)
+3V3: C9.2 C16.2 C17.2 C18.1 C19.2 C22.1 C23.2 C24.2 C25.2 C26.1 IC1.2 IC2.5 J3.1 J3.8 L1.1 R7.2 R21.1 R22.1 R23.2 R28.2 R29.2 R30.2 R31.2 R32.2 R33.2 R34.2 U2.6 U2.14 U2.19 U2.32 U3.6 U3.7 | length 102
  Top Layer w0.3: 54.178,101.863 55.006,101.863 55.117,101.751 55.945,101.751 56.17,101.526 56.17,101.251 56.38,101.041 C25.2@56.4,101.041 57.055,101.041 57.135,100.961 U2.6@58.237,100.961 ; C24.2@60.419,94.717 60.419,95.348 60.437,95.366 U2.14@60.437,96.261 ; U2.19@62.937,96.261 62.937,95.237 63.205,94.969 63.382,94.969 63.482,94.869 C23.2@63.482,94.844 ; U3.6@63.738,44.146 U3.7@64.238,44.146 ; U2.32@67.137,101.461 68.238,101.461 68.609,101.832 68.755,101.832
  Top Layer w0.4: 68.755,101.832 68.929,102.006 69.774,102.006
  Top Layer w0.5: v1(60.122,93.777) 60.122,93.804 60.419,94.101 C24.2@60.419,94.717 ; C23.2@63.38,94.844 63.38,94.228 63.754,93.855 v1(63.754,93.828) ; U3.7@64.238,44.146 64.34,44.044 C19.2@64.34,42.545 ; 69.774,102.006 70.028,102.26 71.399,102.26 ; C17.2@76.419,62.49 76.419,62.527 76.607,62.715 77.451,62.715 C16.2@77.671,62.935 77.891,62.715 78.475,62.715 78.712,62.478 79.178,62.478 v1(79.197,62.459)
  Top Layer w0.6: 71.399,102.26 71.476,102.26 71.882,101.854
  Top Layer w0.7: R23.2@50.109,37.344 50.166,37.287 v1(51.41,37.287) ; v1(51.435,73.406) R31.2@52.507,73.406 R31.2@52.557,73.406 ; v1(51.435,75.311) 51.46,75.286 R32.2@52.553,75.286 ; v1(51.537,71.552) 51.54,71.548 R21.1@52.604,71.548 ; v1(51.595,63.803) 51.68,63.718 R29.2@52.794,63.718 ; v1(53.467,101.863) 54.178,101.863 ; R22.1@62.306,81.813 v1(62.306,83.236) ; C19.2@64.318,42.545 64.338,42.545 64.348,42.535 64.348,41.527 64.546,41.329 ; C18.1@64.546,41.022 64.546,39.721 v1(65.405,38.862) ; IC1.2@73.973,62.462 74,62.49 C17.2@76.419,62.49 ; R33.2@78.202,68.91 v1(79.299,68.91) ; R30.2@78.253,74.879 v1(79.096,74.879) ; R28.2@78.278,73.101 v1(79.146,73.101) ; v1(82.715,77.101) C9.2@83.841,77.101 ; C9.2@83.902,77.101 83.902,79.19 L1.1@83.998,79.286
  Top Layer w0.8: R34.2@49.073,50.698 v1(51.384,50.698) ; v1(67.767,51.537) 67.785,51.519 69.393,51.519 69.411,51.501 IC2.5@71.266,51.501 ; R7.2@69.566,96.799 71.704,96.799 72.466,96.037
  Top Layer w1: v1(71.12,91.338) 71.122,91.338 72.466,89.994 ; 71.882,101.854 72.466,101.27 72.466,96.037 72.466,89.994 ; v1(76.606,86.614) C22.1@76.606,89.103 76.606,89.108 76.306,89.408 73.052,89.408 72.466,89.994 ; v1(89.51,106.401) 89.524,106.386 J3.8@92.913,106.386 ; v1(90.195,92.38) 90.202,92.386 J3.1@92.913,92.386
  Int2 (PWR) w1: v1(53.467,101.863) 53.467,101.013 53.469,97.769 53.469,97.356 53.76,97.064 57.047,93.777 v1(60.122,93.777) 68.682,93.777 v1(71.12,91.338)